# Altium PCB FOOTPRINT FOR BOOTOM PART V1.pcbdoc
Units mil, origin at the board's own origin, x right, y up, seen from the top; angles counter-clockwise.
Board outline 3689 x 3689 mil, 2 copper layers (Top Layer, Bottom Layer), stack 62.2 mil thick; 1 components, 0 nets, 0 pads, 0 vias.
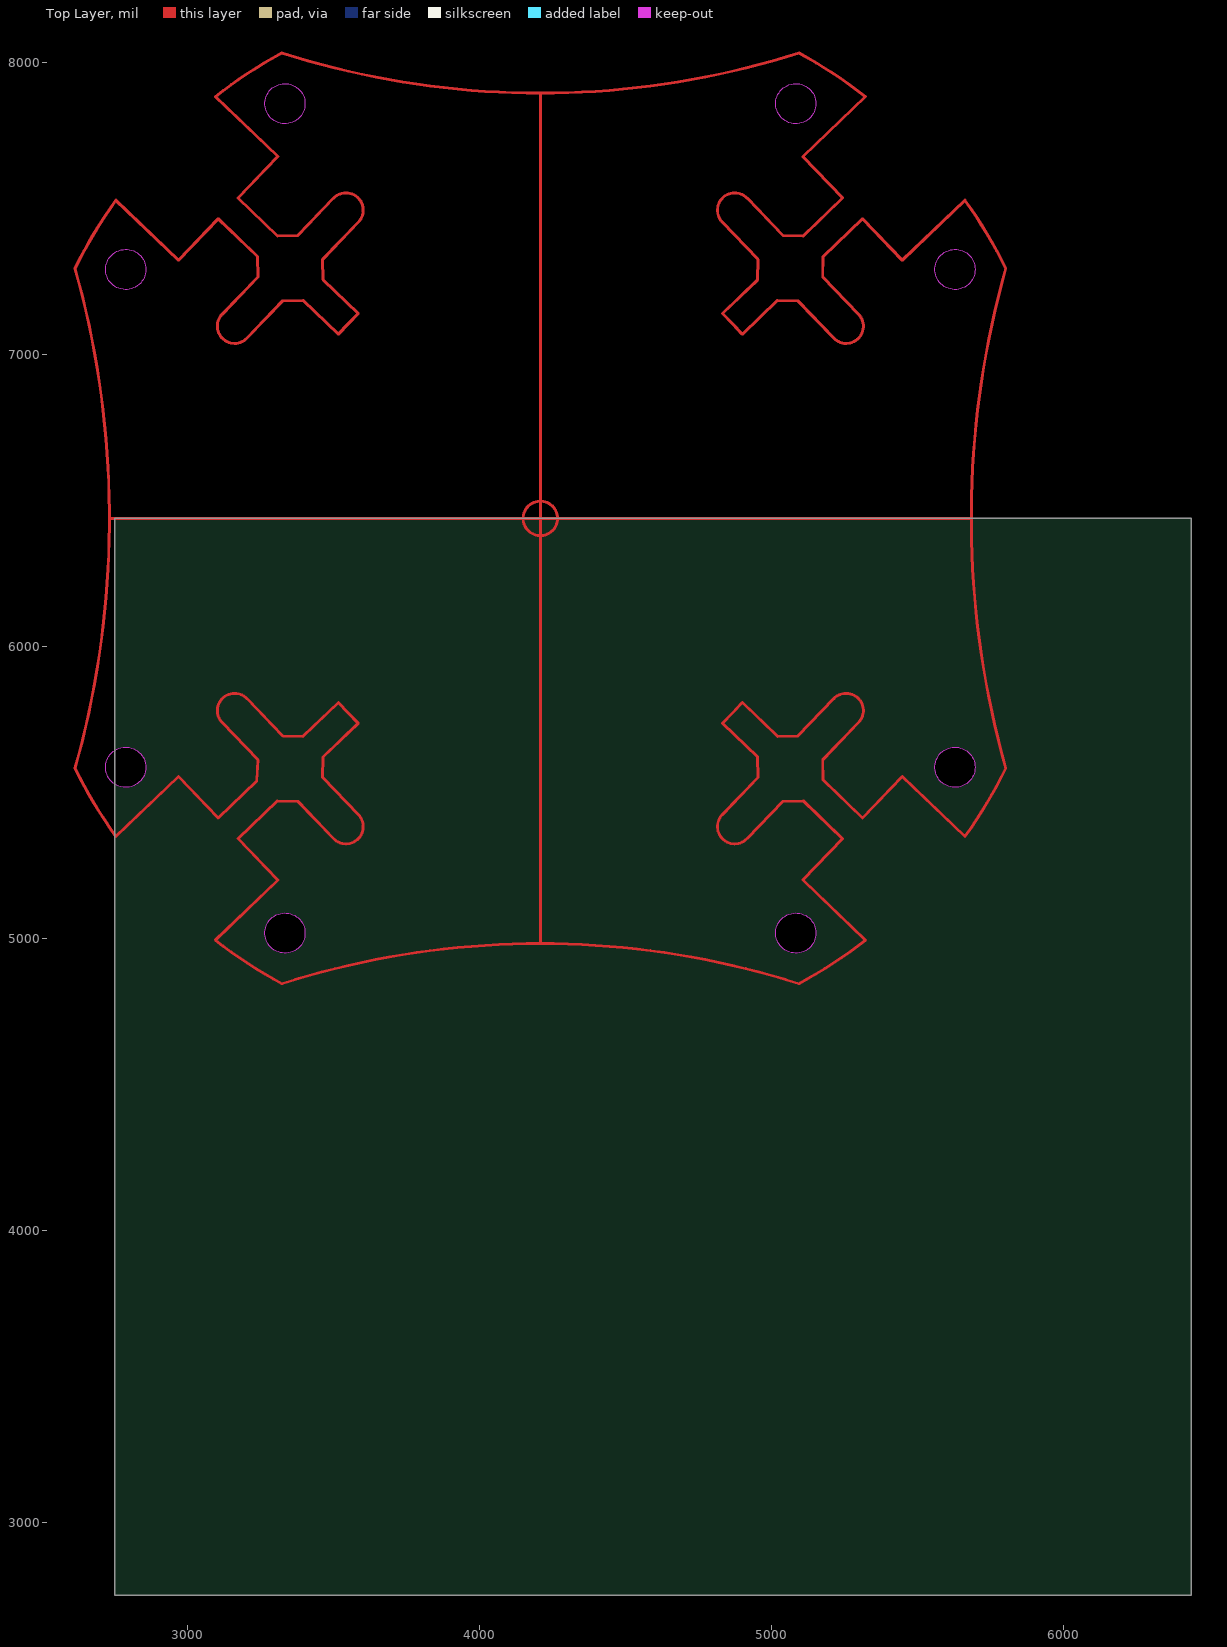
[diagram p0: Top Layer view]
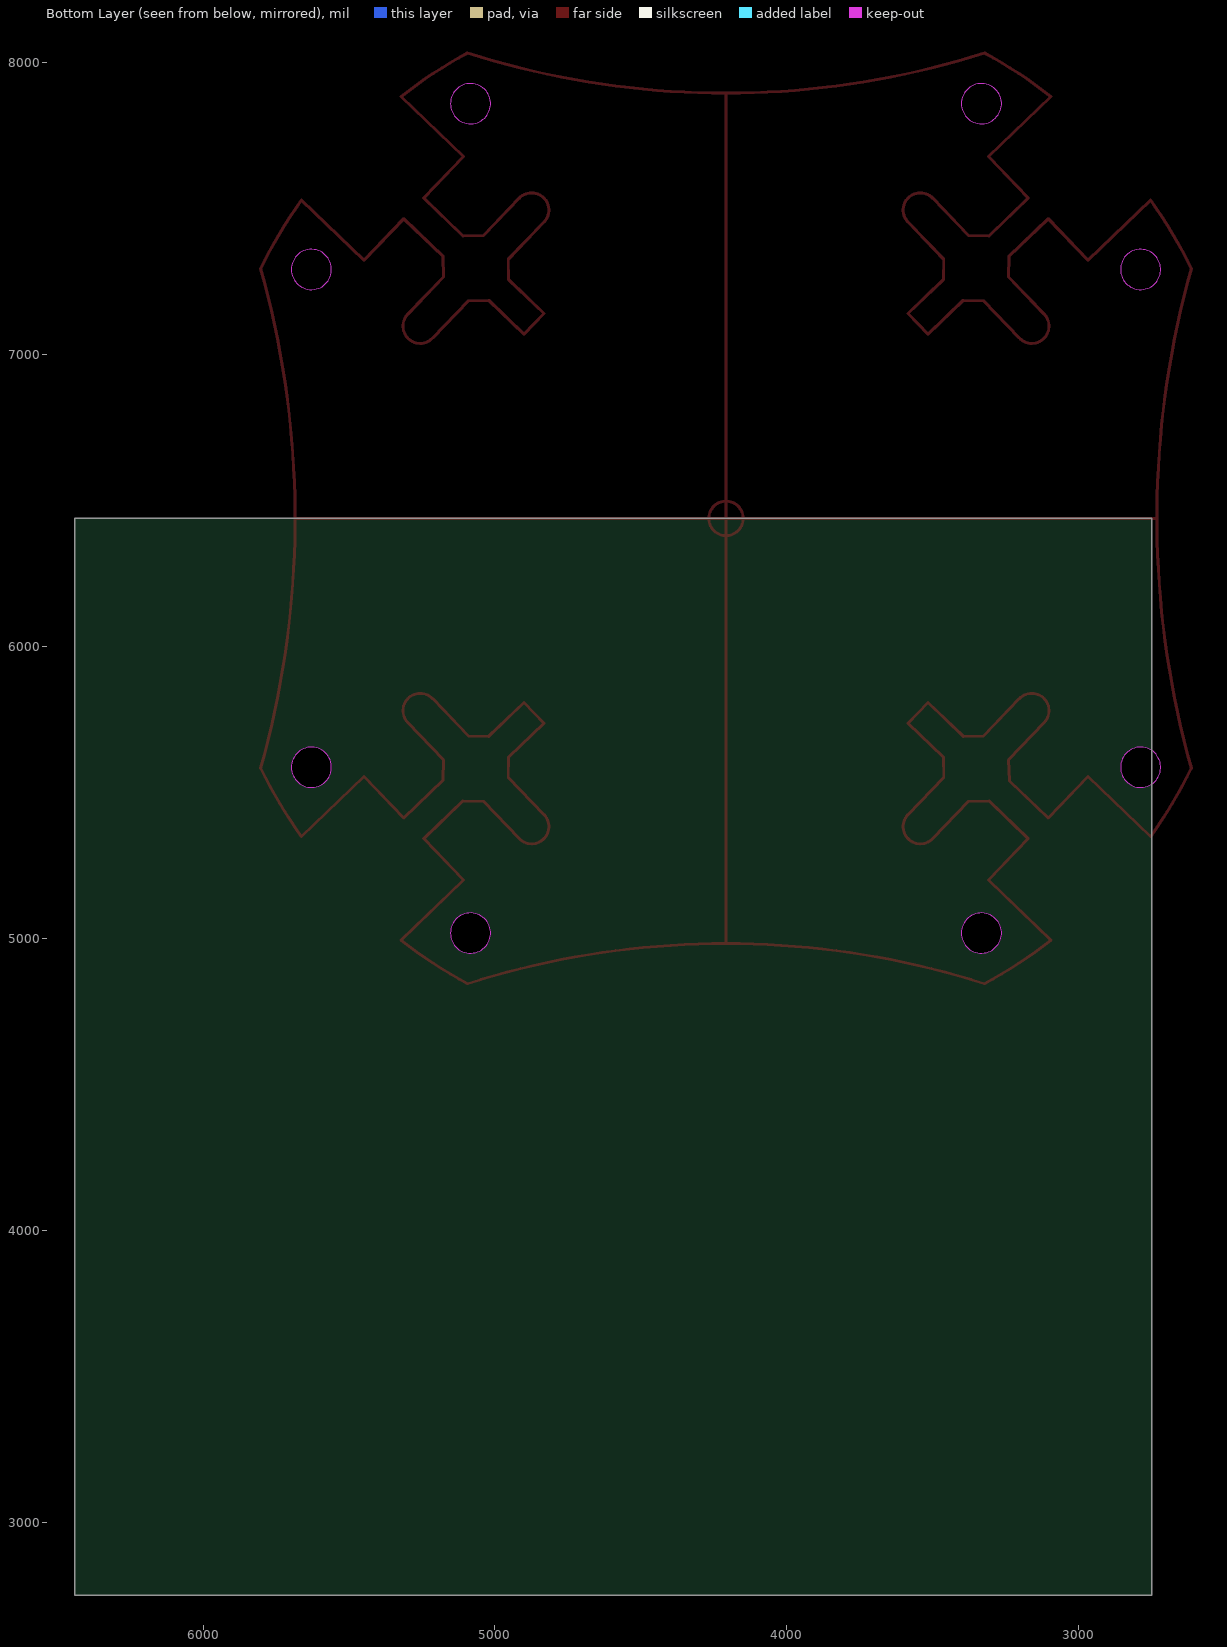
[diagram p1: Bottom Layer view, seen from below]

## Layer stack, top to bottom
Top Solder Mask Layer: solder mask 0.4, Dk 3.3
Top Layer: signal copper 1.4
Dielectric1: surface 59.4, FR4, Dk 4.5
Bottom Layer: signal copper 1.4
Bottom Solder Mask Layer: solder mask 0.4, Dk 3.3

## Board outline
6439,2750 2750,2750 2750,6439 6439,6439

## Components (designator, comment, footprint, x,y, rotation, side; value= is the part's Value field where it differs from the comment)
? "" "FOOTPRINT FOR BOOTOM PART V1" 2507.7,6653.2 r0 top

## Footprints (in the part's own frame and the unit in brackets; to place one, negate y for a bottom-side part, rotate by r counter-clockwise, add the part's x,y. Pads: shape width x height; smd on the part's side, far side on the other; paste and mask are expansions set on the pad)
"FOOTPRINT FOR BOOTOM PART V1" [mil]
  Top Layer drawing of 554 lines, arcs and shapes, not listed
  Board Outline Layer lines w0.1: 211.5,-1070.9 212.3,-1078.2 213.9,-1085.3 216.2,-1092.3 219.2,-1099 222.9,-1105.3 227.3,-1111.2 232.3,-1116.6 237.8,-1121.4 243.8,-1125.6 250.2,-1129.2 257,-1132 264,-1134.2 271.2,-1135.5 278.5,-1136.1 285.8,-1135.9 293.1,-1134.9 300.2,-1133.2 307.1,-1130.7 313.7,-1127.5 319.9,-1123.6 325.7,-1119.1 331,-1114 335.6,-1108.3 339.7,-1102.2 343.1,-1095.7 345.8,-1088.9 347.7,-1081.8 348.8,-1074.5 349.2,-1067.2 348.8,-1059.9 347.7,-1052.7 345.8,-1045.6 343.1,-1038.8 339.7,-1032.2 335.6,-1026.1 331,-1020.5 325.7,-1015.4 319.9,-1010.8 313.7,-1007 307.1,-1003.7 300.2,-1001.3 293.1,-999.5 285.8,-998.5 278.5,-998.3 271.2,-998.9 264,-1000.3 257,-1002.4 250.2,-1005.3 243.8,-1008.8 237.8,-1013 232.3,-1017.9 227.3,-1023.2 222.9,-1029.1 219.2,-1035.5 216.2,-1042.1 213.9,-1049.1 212.3,-1056.3 211.5,-1063.6 211.5,-1070.9 ; 211.5,634.7 212.3,627.4 213.9,620.2 216.2,613.2 219.2,606.6 222.9,600.2 227.3,594.3 232.3,589 237.8,584.1 243.8,579.9 250.2,576.4 257,573.5 264,571.4 271.2,570 278.5,569.4 285.8,569.6 293.1,570.6 300.2,572.4 307.1,574.8 313.7,578.1 319.9,581.9 325.7,586.5 331,591.6 335.6,597.2 339.7,603.3 343.1,609.9 345.8,616.7 347.7,623.8 348.8,631 349.2,638.3 348.8,645.6 347.7,652.9 345.8,660 343.1,666.8 339.7,673.3 335.6,679.4 331,685.1 325.7,690.2 319.9,694.7 313.7,698.6 307.1,701.8 300.2,704.3 293.1,706 285.8,707 278.5,707.2 271.2,706.6 264,705.3 257,703.1 250.2,700.3 243.8,696.7 237.8,692.5 232.3,687.7 227.3,682.3 222.9,676.4 219.2,670.1 216.2,663.4 213.9,656.4 212.3,649.3 211.5,642 211.5,634.7 ; 756.8,-1638.9 757.6,-1646.2 759.2,-1653.4 761.5,-1660.3 764.5,-1667 768.2,-1673.3 772.6,-1679.2 777.6,-1684.6 783.1,-1689.4 789.1,-1693.6 795.5,-1697.2 802.3,-1700.1 809.3,-1702.2 816.5,-1703.5 823.8,-1704.1 831.1,-1703.9 838.4,-1702.9 845.5,-1701.2 852.4,-1698.7 859,-1695.5 865.2,-1691.6 871,-1687.1 876.3,-1682 880.9,-1676.3 885,-1670.2 888.4,-1663.7 891.1,-1656.9 893,-1649.8 894.1,-1642.6 894.5,-1635.2 894.1,-1627.9 893,-1620.7 891.1,-1613.6 888.4,-1606.8 885,-1600.3 880.9,-1594.2 876.3,-1588.5 871,-1583.4 865.2,-1578.9 859,-1575 852.4,-1571.8 845.5,-1569.3 838.4,-1567.5 831.1,-1566.6 823.8,-1566.4 816.5,-1567 809.3,-1568.3 802.3,-1570.4 795.5,-1573.3 789.1,-1576.8 783.1,-1581.1 777.6,-1585.9 772.6,-1591.3 768.2,-1597.2 764.5,-1603.5 761.5,-1610.2 759.2,-1617.1 757.6,-1624.3 756.8,-1631.6 756.8,-1638.9 ; 756.8,1202.7 757.6,1195.4 759.2,1188.2 761.5,1181.3 764.5,1174.6 768.2,1168.3 772.6,1162.4 777.6,1157 783.1,1152.2 789.1,1147.9 795.5,1144.4 802.3,1141.5 809.3,1139.4 816.5,1138.1 823.8,1137.5 831.1,1137.7 838.4,1138.6 845.5,1140.4 852.4,1142.9 859,1146.1 865.2,1150 871,1154.5 876.3,1159.6 880.9,1165.3 885,1171.4 888.4,1177.9 891.1,1184.7 893,1191.8 894.1,1199 894.5,1206.3 894.1,1213.7 893,1220.9 891.1,1228 888.4,1234.8 885,1241.3 880.9,1247.4 876.3,1253.1 871,1258.2 865.2,1262.7 859,1266.6 852.4,1269.8 845.5,1272.3 838.4,1274 831.1,1275 823.8,1275.2 816.5,1274.6 809.3,1273.3 802.3,1271.2 795.5,1268.3 789.1,1264.8 783.1,1260.5 777.6,1255.7 772.6,1250.3 768.2,1244.4 764.5,1238.1 761.5,1231.4 759.2,1224.5 757.6,1217.3 756.8,1210 756.8,1202.7 ; 2507.2,-1638.9 2508,-1646.2 2509.6,-1653.4 2511.9,-1660.3 2514.9,-1667 2518.6,-1673.3 2523,-1679.2 2528,-1684.6 2533.5,-1689.4 2539.5,-1693.6 2545.9,-1697.2 2552.7,-1700.1 2559.7,-1702.2 2566.9,-1703.5 2574.2,-1704.1 2581.5,-1703.9 2588.8,-1702.9 2595.9,-1701.2 2602.8,-1698.7 2609.4,-1695.5 2615.7,-1691.6 2621.4,-1687.1 2626.7,-1682 2631.4,-1676.3 2635.4,-1670.2 2638.8,-1663.7 2641.5,-1656.9 2643.4,-1649.8 2644.6,-1642.6 2644.9,-1635.2 2644.6,-1627.9 2643.4,-1620.7 2641.5,-1613.6 2638.8,-1606.8 2635.4,-1600.3 2631.4,-1594.2 2626.7,-1588.5 2621.4,-1583.4 2615.7,-1578.9 2609.4,-1575 2602.8,-1571.8 2595.9,-1569.3 2588.8,-1567.5 2581.5,-1566.6 2574.2,-1566.4 2566.9,-1567 2559.7,-1568.3 2552.7,-1570.4 2545.9,-1573.3 2539.5,-1576.8 2533.5,-1581.1 2528,-1585.9 2523,-1591.3 2518.6,-1597.2 2514.9,-1603.5 2511.9,-1610.2 2509.6,-1617.1 2508,-1624.3 2507.2,-1631.6 2507.2,-1638.9 ; 2507.2,1202.7 2508,1195.4 2509.6,1188.2 2511.9,1181.3 2514.9,1174.6 2518.6,1168.3 2523,1162.4 2528,1157 2533.5,1152.2 2539.5,1147.9 2545.9,1144.4 2552.7,1141.5 2559.7,1139.4 2566.9,1138.1 2574.2,1137.5 2581.5,1137.7 2588.8,1138.6 2595.9,1140.4 2602.8,1142.9 2609.4,1146.1 2615.7,1150 2621.4,1154.5 2626.7,1159.6 2631.4,1165.3 2635.4,1171.4 2638.8,1177.9 2641.5,1184.7 2643.4,1191.8 2644.6,1199 2644.9,1206.3 2644.6,1213.7 2643.4,1220.9 2641.5,1228 2638.8,1234.8 2635.4,1241.3 2631.4,1247.4 2626.7,1253.1 2621.4,1258.2 2615.7,1262.7 2609.4,1266.6 2602.8,1269.8 2595.9,1272.3 2588.8,1274 2581.5,1275 2574.2,1275.2 2566.9,1274.6 2559.7,1273.3 2552.7,1271.2 2545.9,1268.3 2539.5,1264.8 2533.5,1260.5 2528,1255.7 2523,1250.3 2518.6,1244.4 2514.9,1238.1 2511.9,1231.4 2509.6,1224.5 2508,1217.3 2507.2,1210 2507.2,1202.7 ; 3052.6,-1070.9 3053.3,-1078.2 3054.9,-1085.3 3057.2,-1092.3 3060.2,-1099 3063.9,-1105.3 3068.3,-1111.2 3073.3,-1116.6 3078.8,-1121.4 3084.8,-1125.6 3091.2,-1129.2 3098,-1132 3105,-1134.2 3112.2,-1135.5 3119.5,-1136.1 3126.8,-1135.9 3134.1,-1134.9 3141.2,-1133.2 3148.1,-1130.7 3154.7,-1127.5 3161,-1123.6 3166.7,-1119.1 3172,-1114 3176.7,-1108.3 3180.7,-1102.2 3184.1,-1095.7 3186.8,-1088.9 3188.7,-1081.8 3189.9,-1074.5 3190.2,-1067.2 3189.9,-1059.9 3188.7,-1052.7 3186.8,-1045.6 3184.1,-1038.8 3180.7,-1032.2 3176.7,-1026.1 3172,-1020.5 3166.7,-1015.4 3161,-1010.8 3154.7,-1007 3148.1,-1003.7 3141.2,-1001.3 3134.1,-999.5 3126.8,-998.5 3119.5,-998.3 3112.2,-998.9 3105,-1000.3 3098,-1002.4 3091.2,-1005.3 3084.8,-1008.8 3078.8,-1013 3073.3,-1017.9 3068.3,-1023.2 3063.9,-1029.1 3060.2,-1035.5 3057.2,-1042.1 3054.9,-1049.1 3053.3,-1056.3 3052.6,-1063.6 3052.6,-1070.9 ; 3052.6,634.7 3053.3,627.4 3054.9,620.2 3057.2,613.2 3060.2,606.6 3063.9,600.2 3068.3,594.3 3073.3,589 3078.8,584.1 3084.8,579.9 3091.2,576.4 3098,573.5 3105,571.4 3112.2,570 3119.5,569.4 3126.8,569.6 3134.1,570.6 3141.2,572.4 3148.1,574.8 3154.7,578.1 3161,581.9 3166.7,586.5 3172,591.6 3176.7,597.2 3180.7,603.3 3184.1,609.9 3186.8,616.7 3188.7,623.8 3189.9,631 3190.2,638.3 3189.9,645.6 3188.7,652.9 3186.8,660 3184.1,666.8 3180.7,673.3 3176.7,679.4 3172,685.1 3166.7,690.2 3161,694.7 3154.7,698.6 3148.1,701.8 3141.2,704.3 3134.1,706 3126.8,707 3119.5,707.2 3112.2,706.6 3105,705.3 3098,703.1 3091.2,700.3 3084.8,696.7 3078.8,692.5 3073.3,687.7 3068.3,682.3 3063.9,676.4 3060.2,670.1 3057.2,663.4 3054.9,656.4 3053.3,649.3 3052.6,642 3052.6,634.7
  Board Outline Layer region: 3190.2,638.3 3189.9,631 3188.7,623.8 3186.8,616.7 3184.1,609.9 3180.7,603.3 3176.7,597.2 3172,591.6 3166.7,586.5 3161,581.9 3154.7,578.1 3148.1,574.8 3141.2,572.4 3134.1,570.6 3126.8,569.6 3119.5,569.4 3112.2,570 3105,571.4 3098,573.5 3091.2,576.4 3084.8,579.9 3078.8,584.1 3073.3,589 3068.3,594.3 3063.9,600.2 3060.2,606.6 3057.2,613.2 3054.9,620.2 3053.3,627.4 3052.6,634.7 3052.6,642 3053.3,649.3 3054.9,656.4 3057.2,663.4 3060.2,670.1 3063.9,676.4 3068.3,682.3 3073.3,687.7 3078.8,692.5 3084.8,696.7 3091.2,700.3 3098,703.1 3105,705.3 3112.2,706.6 3119.5,707.2 3126.8,707 3134.1,706 3141.2,704.3 3148.1,701.8 3154.7,698.6 3161,694.7 3166.7,690.2 3172,685.1 3176.7,679.4 3180.7,673.3 3184.1,666.8 3186.8,660 3188.7,652.9 3189.9,645.6
  Board Outline Layer region: 3190.2,638.3 3189.9,631 3188.7,623.8 3186.8,616.7 3184.1,609.9 3180.7,603.3 3176.7,597.2 3172,591.6 3166.7,586.5 3161,581.9 3154.7,578.1 3148.1,574.8 3141.2,572.4 3134.1,570.6 3126.8,569.6 3119.5,569.4 3112.2,570 3105,571.4 3098,573.5 3091.2,576.4 3084.8,579.9 3078.8,584.1 3073.3,589 3068.3,594.3 3063.9,600.2 3060.2,606.6 3057.2,613.2 3054.9,620.2 3053.3,627.4 3052.6,634.7 3052.6,642 3053.3,649.3 3054.9,656.4 3057.2,663.4 3060.2,670.1 3063.9,676.4 3068.3,682.3 3073.3,687.7 3078.8,692.5 3084.8,696.7 3091.2,700.3 3098,703.1 3105,705.3 3112.2,706.6 3119.5,707.2 3126.8,707 3134.1,706 3141.2,704.3 3148.1,701.8 3154.7,698.6 3161,694.7 3166.7,690.2 3172,685.1 3176.7,679.4 3180.7,673.3 3184.1,666.8 3186.8,660 3188.7,652.9 3189.9,645.6
  Board Outline Layer region: 2644.9,1206.3 2644.6,1199 2643.4,1191.8 2641.5,1184.7 2638.8,1177.9 2635.4,1171.4 2631.4,1165.3 2626.7,1159.6 2621.4,1154.5 2615.7,1150 2609.4,1146.1 2602.8,1142.9 2595.9,1140.4 2588.8,1138.6 2581.5,1137.7 2574.2,1137.5 2566.9,1138.1 2559.7,1139.4 2552.7,1141.5 2545.9,1144.4 2539.5,1147.9 2533.5,1152.2 2528,1157 2523,1162.4 2518.6,1168.3 2514.9,1174.6 2511.9,1181.3 2509.6,1188.2 2508,1195.4 2507.2,1202.7 2507.2,1210 2508,1217.3 2509.6,1224.5 2511.9,1231.4 2514.9,1238.1 2518.6,1244.4 2523,1250.3 2528,1255.7 2533.5,1260.5 2539.5,1264.8 2545.9,1268.3 2552.7,1271.2 2559.7,1273.3 2566.9,1274.6 2574.2,1275.2 2581.5,1275 2588.8,1274 2595.9,1272.3 2602.8,1269.8 2609.4,1266.6 2615.7,1262.7 2621.4,1258.2 2626.7,1253.1 2631.4,1247.4 2635.4,1241.3 2638.8,1234.8 2641.5,1228 2643.4,1220.9 2644.6,1213.7
  Board Outline Layer region: 2644.9,1206.3 2644.6,1199 2643.4,1191.8 2641.5,1184.7 2638.8,1177.9 2635.4,1171.4 2631.4,1165.3 2626.7,1159.6 2621.4,1154.5 2615.7,1150 2609.4,1146.1 2602.8,1142.9 2595.9,1140.4 2588.8,1138.6 2581.5,1137.7 2574.2,1137.5 2566.9,1138.1 2559.7,1139.4 2552.7,1141.5 2545.9,1144.4 2539.5,1147.9 2533.5,1152.2 2528,1157 2523,1162.4 2518.6,1168.3 2514.9,1174.6 2511.9,1181.3 2509.6,1188.2 2508,1195.4 2507.2,1202.7 2507.2,1210 2508,1217.3 2509.6,1224.5 2511.9,1231.4 2514.9,1238.1 2518.6,1244.4 2523,1250.3 2528,1255.7 2533.5,1260.5 2539.5,1264.8 2545.9,1268.3 2552.7,1271.2 2559.7,1273.3 2566.9,1274.6 2574.2,1275.2 2581.5,1275 2588.8,1274 2595.9,1272.3 2602.8,1269.8 2609.4,1266.6 2615.7,1262.7 2621.4,1258.2 2626.7,1253.1 2631.4,1247.4 2635.4,1241.3 2638.8,1234.8 2641.5,1228 2643.4,1220.9 2644.6,1213.7
  Board Outline Layer region: 894.5,1206.3 894.1,1199 893,1191.8 891.1,1184.7 888.4,1177.9 885,1171.4 880.9,1165.3 876.3,1159.6 871,1154.5 865.2,1150 859,1146.1 852.4,1142.9 845.5,1140.4 838.4,1138.6 831.1,1137.7 823.8,1137.5 816.5,1138.1 809.3,1139.4 802.3,1141.5 795.5,1144.4 789.1,1147.9 783.1,1152.2 777.6,1157 772.6,1162.4 768.2,1168.3 764.5,1174.6 761.5,1181.3 759.2,1188.2 757.6,1195.4 756.8,1202.7 756.8,1210 757.6,1217.3 759.2,1224.5 761.5,1231.4 764.5,1238.1 768.2,1244.4 772.6,1250.3 777.6,1255.7 783.1,1260.5 789.1,1264.8 795.5,1268.3 802.3,1271.2 809.3,1273.3 816.5,1274.6 823.8,1275.2 831.1,1275 838.4,1274 845.5,1272.3 852.4,1269.8 859,1266.6 865.2,1262.7 871,1258.2 876.3,1253.1 880.9,1247.4 885,1241.3 888.4,1234.8 891.1,1228 893,1220.9 894.1,1213.7
  Board Outline Layer region: 894.5,1206.3 894.1,1199 893,1191.8 891.1,1184.7 888.4,1177.9 885,1171.4 880.9,1165.3 876.3,1159.6 871,1154.5 865.2,1150 859,1146.1 852.4,1142.9 845.5,1140.4 838.4,1138.6 831.1,1137.7 823.8,1137.5 816.5,1138.1 809.3,1139.4 802.3,1141.5 795.5,1144.4 789.1,1147.9 783.1,1152.2 777.6,1157 772.6,1162.4 768.2,1168.3 764.5,1174.6 761.5,1181.3 759.2,1188.2 757.6,1195.4 756.8,1202.7 756.8,1210 757.6,1217.3 759.2,1224.5 761.5,1231.4 764.5,1238.1 768.2,1244.4 772.6,1250.3 777.6,1255.7 783.1,1260.5 789.1,1264.8 795.5,1268.3 802.3,1271.2 809.3,1273.3 816.5,1274.6 823.8,1275.2 831.1,1275 838.4,1274 845.5,1272.3 852.4,1269.8 859,1266.6 865.2,1262.7 871,1258.2 876.3,1253.1 880.9,1247.4 885,1241.3 888.4,1234.8 891.1,1228 893,1220.9 894.1,1213.7
  Board Outline Layer region: 349.2,638.3 348.8,631 347.7,623.8 345.8,616.7 343.1,609.9 339.7,603.3 335.6,597.2 331,591.6 325.7,586.5 319.9,581.9 313.7,578.1 307.1,574.8 300.2,572.4 293.1,570.6 285.8,569.6 278.5,569.4 271.2,570 264,571.4 257,573.5 250.2,576.4 243.8,579.9 237.8,584.1 232.3,589 227.3,594.3 222.9,600.2 219.2,606.6 216.2,613.2 213.9,620.2 212.3,627.4 211.5,634.7 211.5,642 212.3,649.3 213.9,656.4 216.2,663.4 219.2,670.1 222.9,676.4 227.3,682.3 232.3,687.7 237.8,692.5 243.8,696.7 250.2,700.3 257,703.1 264,705.3 271.2,706.6 278.5,707.2 285.8,707 293.1,706 300.2,704.3 307.1,701.8 313.7,698.6 319.9,694.7 325.7,690.2 331,685.1 335.6,679.4 339.7,673.3 343.1,666.8 345.8,660 347.7,652.9 348.8,645.6
  Board Outline Layer region: 349.2,638.3 348.8,631 347.7,623.8 345.8,616.7 343.1,609.9 339.7,603.3 335.6,597.2 331,591.6 325.7,586.5 319.9,581.9 313.7,578.1 307.1,574.8 300.2,572.4 293.1,570.6 285.8,569.6 278.5,569.4 271.2,570 264,571.4 257,573.5 250.2,576.4 243.8,579.9 237.8,584.1 232.3,589 227.3,594.3 222.9,600.2 219.2,606.6 216.2,613.2 213.9,620.2 212.3,627.4 211.5,634.7 211.5,642 212.3,649.3 213.9,656.4 216.2,663.4 219.2,670.1 222.9,676.4 227.3,682.3 232.3,687.7 237.8,692.5 243.8,696.7 250.2,700.3 257,703.1 264,705.3 271.2,706.6 278.5,707.2 285.8,707 293.1,706 300.2,704.3 307.1,701.8 313.7,698.6 319.9,694.7 325.7,690.2 331,685.1 335.6,679.4 339.7,673.3 343.1,666.8 345.8,660 347.7,652.9 348.8,645.6
  Board Outline Layer region: 3190.2,-1067.2 3189.9,-1074.5 3188.7,-1081.8 3186.8,-1088.9 3184.1,-1095.7 3180.7,-1102.2 3176.7,-1108.3 3172,-1114 3166.7,-1119.1 3161,-1123.6 3154.7,-1127.5 3148.1,-1130.7 3141.2,-1133.2 3134.1,-1134.9 3126.8,-1135.9 3119.5,-1136.1 3112.2,-1135.5 3105,-1134.2 3098,-1132 3091.2,-1129.2 3084.8,-1125.6 3078.8,-1121.4 3073.3,-1116.6 3068.3,-1111.2 3063.9,-1105.3 3060.2,-1099 3057.2,-1092.3 3054.9,-1085.3 3053.3,-1078.2 3052.6,-1070.9 3052.6,-1063.6 3053.3,-1056.3 3054.9,-1049.1 3057.2,-1042.1 3060.2,-1035.5 3063.9,-1029.1 3068.3,-1023.2 3073.3,-1017.9 3078.8,-1013 3084.8,-1008.8 3091.2,-1005.3 3098,-1002.4 3105,-1000.3 3112.2,-998.9 3119.5,-998.3 3126.8,-998.5 3134.1,-999.5 3141.2,-1001.3 3148.1,-1003.7 3154.7,-1007 3161,-1010.8 3166.7,-1015.4 3172,-1020.5 3176.7,-1026.1 3180.7,-1032.2 3184.1,-1038.8 3186.8,-1045.6 3188.7,-1052.7 3189.9,-1059.9
  Board Outline Layer region: 3190.2,-1067.2 3189.9,-1074.5 3188.7,-1081.8 3186.8,-1088.9 3184.1,-1095.7 3180.7,-1102.2 3176.7,-1108.3 3172,-1114 3166.7,-1119.1 3161,-1123.6 3154.7,-1127.5 3148.1,-1130.7 3141.2,-1133.2 3134.1,-1134.9 3126.8,-1135.9 3119.5,-1136.1 3112.2,-1135.5 3105,-1134.2 3098,-1132 3091.2,-1129.2 3084.8,-1125.6 3078.8,-1121.4 3073.3,-1116.6 3068.3,-1111.2 3063.9,-1105.3 3060.2,-1099 3057.2,-1092.3 3054.9,-1085.3 3053.3,-1078.2 3052.6,-1070.9 3052.6,-1063.6 3053.3,-1056.3 3054.9,-1049.1 3057.2,-1042.1 3060.2,-1035.5 3063.9,-1029.1 3068.3,-1023.2 3073.3,-1017.9 3078.8,-1013 3084.8,-1008.8 3091.2,-1005.3 3098,-1002.4 3105,-1000.3 3112.2,-998.9 3119.5,-998.3 3126.8,-998.5 3134.1,-999.5 3141.2,-1001.3 3148.1,-1003.7 3154.7,-1007 3161,-1010.8 3166.7,-1015.4 3172,-1020.5 3176.7,-1026.1 3180.7,-1032.2 3184.1,-1038.8 3186.8,-1045.6 3188.7,-1052.7 3189.9,-1059.9
  Board Outline Layer region: 2644.9,-1635.2 2644.6,-1642.6 2643.4,-1649.8 2641.5,-1656.9 2638.8,-1663.7 2635.4,-1670.2 2631.4,-1676.3 2626.7,-1682 2621.4,-1687.1 2615.7,-1691.6 2609.4,-1695.5 2602.8,-1698.7 2595.9,-1701.2 2588.8,-1702.9 2581.5,-1703.9 2574.2,-1704.1 2566.9,-1703.5 2559.7,-1702.2 2552.7,-1700.1 2545.9,-1697.2 2539.5,-1693.6 2533.5,-1689.4 2528,-1684.6 2523,-1679.2 2518.6,-1673.3 2514.9,-1667 2511.9,-1660.3 2509.6,-1653.4 2508,-1646.2 2507.2,-1638.9 2507.2,-1631.6 2508,-1624.3 2509.6,-1617.1 2511.9,-1610.2 2514.9,-1603.5 2518.6,-1597.2 2523,-1591.3 2528,-1585.9 2533.5,-1581.1 2539.5,-1576.8 2545.9,-1573.3 2552.7,-1570.4 2559.7,-1568.3 2566.9,-1567 2574.2,-1566.4 2581.5,-1566.6 2588.8,-1567.5 2595.9,-1569.3 2602.8,-1571.8 2609.4,-1575 2615.7,-1578.9 2621.4,-1583.4 2626.7,-1588.5 2631.4,-1594.2 2635.4,-1600.3 2638.8,-1606.8 2641.5,-1613.6 2643.4,-1620.7 2644.6,-1627.9
  Board Outline Layer region: 2644.9,-1635.2 2644.6,-1642.6 2643.4,-1649.8 2641.5,-1656.9 2638.8,-1663.7 2635.4,-1670.2 2631.4,-1676.3 2626.7,-1682 2621.4,-1687.1 2615.7,-1691.6 2609.4,-1695.5 2602.8,-1698.7 2595.9,-1701.2 2588.8,-1702.9 2581.5,-1703.9 2574.2,-1704.1 2566.9,-1703.5 2559.7,-1702.2 2552.7,-1700.1 2545.9,-1697.2 2539.5,-1693.6 2533.5,-1689.4 2528,-1684.6 2523,-1679.2 2518.6,-1673.3 2514.9,-1667 2511.9,-1660.3 2509.6,-1653.4 2508,-1646.2 2507.2,-1638.9 2507.2,-1631.6 2508,-1624.3 2509.6,-1617.1 2511.9,-1610.2 2514.9,-1603.5 2518.6,-1597.2 2523,-1591.3 2528,-1585.9 2533.5,-1581.1 2539.5,-1576.8 2545.9,-1573.3 2552.7,-1570.4 2559.7,-1568.3 2566.9,-1567 2574.2,-1566.4 2581.5,-1566.6 2588.8,-1567.5 2595.9,-1569.3 2602.8,-1571.8 2609.4,-1575 2615.7,-1578.9 2621.4,-1583.4 2626.7,-1588.5 2631.4,-1594.2 2635.4,-1600.3 2638.8,-1606.8 2641.5,-1613.6 2643.4,-1620.7 2644.6,-1627.9
  Board Outline Layer region: 894.5,-1635.2 894.1,-1642.6 893,-1649.8 891.1,-1656.9 888.4,-1663.7 885,-1670.2 880.9,-1676.3 876.3,-1682 871,-1687.1 865.2,-1691.6 859,-1695.5 852.4,-1698.7 845.5,-1701.2 838.4,-1702.9 831.1,-1703.9 823.8,-1704.1 816.5,-1703.5 809.3,-1702.2 802.3,-1700.1 795.5,-1697.2 789.1,-1693.6 783.1,-1689.4 777.6,-1684.6 772.6,-1679.2 768.2,-1673.3 764.5,-1667 761.5,-1660.3 759.2,-1653.4 757.6,-1646.2 756.8,-1638.9 756.8,-1631.6 757.6,-1624.3 759.2,-1617.1 761.5,-1610.2 764.5,-1603.5 768.2,-1597.2 772.6,-1591.3 777.6,-1585.9 783.1,-1581.1 789.1,-1576.8 795.5,-1573.3 802.3,-1570.4 809.3,-1568.3 816.5,-1567 823.8,-1566.4 831.1,-1566.6 838.4,-1567.5 845.5,-1569.3 852.4,-1571.8 859,-1575 865.2,-1578.9 871,-1583.4 876.3,-1588.5 880.9,-1594.2 885,-1600.3 888.4,-1606.8 891.1,-1613.6 893,-1620.7 894.1,-1627.9
  Board Outline Layer region: 894.5,-1635.2 894.1,-1642.6 893,-1649.8 891.1,-1656.9 888.4,-1663.7 885,-1670.2 880.9,-1676.3 876.3,-1682 871,-1687.1 865.2,-1691.6 859,-1695.5 852.4,-1698.7 845.5,-1701.2 838.4,-1702.9 831.1,-1703.9 823.8,-1704.1 816.5,-1703.5 809.3,-1702.2 802.3,-1700.1 795.5,-1697.2 789.1,-1693.6 783.1,-1689.4 777.6,-1684.6 772.6,-1679.2 768.2,-1673.3 764.5,-1667 761.5,-1660.3 759.2,-1653.4 757.6,-1646.2 756.8,-1638.9 756.8,-1631.6 757.6,-1624.3 759.2,-1617.1 761.5,-1610.2 764.5,-1603.5 768.2,-1597.2 772.6,-1591.3 777.6,-1585.9 783.1,-1581.1 789.1,-1576.8 795.5,-1573.3 802.3,-1570.4 809.3,-1568.3 816.5,-1567 823.8,-1566.4 831.1,-1566.6 838.4,-1567.5 845.5,-1569.3 852.4,-1571.8 859,-1575 865.2,-1578.9 871,-1583.4 876.3,-1588.5 880.9,-1594.2 885,-1600.3 888.4,-1606.8 891.1,-1613.6 893,-1620.7 894.1,-1627.9
  Board Outline Layer region: 349.2,-1067.2 348.8,-1074.5 347.7,-1081.8 345.8,-1088.9 343.1,-1095.7 339.7,-1102.2 335.6,-1108.3 331,-1114 325.7,-1119.1 319.9,-1123.6 313.7,-1127.5 307.1,-1130.7 300.2,-1133.2 293.1,-1134.9 285.8,-1135.9 278.5,-1136.1 271.2,-1135.5 264,-1134.2 257,-1132 250.2,-1129.2 243.8,-1125.6 237.8,-1121.4 232.3,-1116.6 227.3,-1111.2 222.9,-1105.3 219.2,-1099 216.2,-1092.3 213.9,-1085.3 212.3,-1078.2 211.5,-1070.9 211.5,-1063.6 212.3,-1056.3 213.9,-1049.1 216.2,-1042.1 219.2,-1035.5 222.9,-1029.1 227.3,-1023.2 232.3,-1017.9 237.8,-1013 243.8,-1008.8 250.2,-1005.3 257,-1002.4 264,-1000.3 271.2,-998.9 278.5,-998.3 285.8,-998.5 293.1,-999.5 300.2,-1001.3 307.1,-1003.7 313.7,-1007 319.9,-1010.8 325.7,-1015.4 331,-1020.5 335.6,-1026.1 339.7,-1032.2 343.1,-1038.8 345.8,-1045.6 347.7,-1052.7 348.8,-1059.9
  Board Outline Layer region: 349.2,-1067.2 348.8,-1074.5 347.7,-1081.8 345.8,-1088.9 343.1,-1095.7 339.7,-1102.2 335.6,-1108.3 331,-1114 325.7,-1119.1 319.9,-1123.6 313.7,-1127.5 307.1,-1130.7 300.2,-1133.2 293.1,-1134.9 285.8,-1135.9 278.5,-1136.1 271.2,-1135.5 264,-1134.2 257,-1132 250.2,-1129.2 243.8,-1125.6 237.8,-1121.4 232.3,-1116.6 227.3,-1111.2 222.9,-1105.3 219.2,-1099 216.2,-1092.3 213.9,-1085.3 212.3,-1078.2 211.5,-1070.9 211.5,-1063.6 212.3,-1056.3 213.9,-1049.1 216.2,-1042.1 219.2,-1035.5 222.9,-1029.1 227.3,-1023.2 232.3,-1017.9 237.8,-1013 243.8,-1008.8 250.2,-1005.3 257,-1002.4 264,-1000.3 271.2,-998.9 278.5,-998.3 285.8,-998.5 293.1,-999.5 300.2,-1001.3 307.1,-1003.7 313.7,-1007 319.9,-1010.8 325.7,-1015.4 331,-1020.5 335.6,-1026.1 339.7,-1032.2 343.1,-1038.8 345.8,-1045.6 347.7,-1052.7 348.8,-1059.9
  Multi-Layer board cut-out: 3190.2,638.3 3189.9,631 3188.7,623.8 3186.8,616.7 3184.1,609.9 3180.7,603.3 3176.7,597.2 3172,591.6 3166.7,586.5 3161,581.9 3154.7,578.1 3148.1,574.8 3141.2,572.4 3134.1,570.6 3126.8,569.6 3119.5,569.4 3112.2,570 3105,571.4 3098,573.5 3091.2,576.4 3084.8,579.9 3078.8,584.1 3073.3,589 3068.3,594.3 3063.9,600.2 3060.2,606.6 3057.2,613.2 3054.9,620.2 3053.3,627.4 3052.6,634.7 3052.6,642 3053.3,649.3 3054.9,656.4 3057.2,663.4 3060.2,670.1 3063.9,676.4 3068.3,682.3 3073.3,687.7 3078.8,692.5 3084.8,696.7 3091.2,700.3 3098,703.1 3105,705.3 3112.2,706.6 3119.5,707.2 3126.8,707 3134.1,706 3141.2,704.3 3148.1,701.8 3154.7,698.6 3161,694.7 3166.7,690.2 3172,685.1 3176.7,679.4 3180.7,673.3 3184.1,666.8 3186.8,660 3188.7,652.9 3189.9,645.6
  Multi-Layer board cut-out: 2644.9,1206.3 2644.6,1199 2643.4,1191.8 2641.5,1184.7 2638.8,1177.9 2635.4,1171.4 2631.4,1165.3 2626.7,1159.6 2621.4,1154.5 2615.7,1150 2609.4,1146.1 2602.8,1142.9 2595.9,1140.4 2588.8,1138.6 2581.5,1137.7 2574.2,1137.5 2566.9,1138.1 2559.7,1139.4 2552.7,1141.5 2545.9,1144.4 2539.5,1147.9 2533.5,1152.2 2528,1157 2523,1162.4 2518.6,1168.3 2514.9,1174.6 2511.9,1181.3 2509.6,1188.2 2508,1195.4 2507.2,1202.7 2507.2,1210 2508,1217.3 2509.6,1224.5 2511.9,1231.4 2514.9,1238.1 2518.6,1244.4 2523,1250.3 2528,1255.7 2533.5,1260.5 2539.5,1264.8 2545.9,1268.3 2552.7,1271.2 2559.7,1273.3 2566.9,1274.6 2574.2,1275.2 2581.5,1275 2588.8,1274 2595.9,1272.3 2602.8,1269.8 2609.4,1266.6 2615.7,1262.7 2621.4,1258.2 2626.7,1253.1 2631.4,1247.4 2635.4,1241.3 2638.8,1234.8 2641.5,1228 2643.4,1220.9 2644.6,1213.7
  Multi-Layer board cut-out: 894.5,1206.3 894.1,1199 893,1191.8 891.1,1184.7 888.4,1177.9 885,1171.4 880.9,1165.3 876.3,1159.6 871,1154.5 865.2,1150 859,1146.1 852.4,1142.9 845.5,1140.4 838.4,1138.6 831.1,1137.7 823.8,1137.5 816.5,1138.1 809.3,1139.4 802.3,1141.5 795.5,1144.4 789.1,1147.9 783.1,1152.2 777.6,1157 772.6,1162.4 768.2,1168.3 764.5,1174.6 761.5,1181.3 759.2,1188.2 757.6,1195.4 756.8,1202.7 756.8,1210 757.6,1217.3 759.2,1224.5 761.5,1231.4 764.5,1238.1 768.2,1244.4 772.6,1250.3 777.6,1255.7 783.1,1260.5 789.1,1264.8 795.5,1268.3 802.3,1271.2 809.3,1273.3 816.5,1274.6 823.8,1275.2 831.1,1275 838.4,1274 845.5,1272.3 852.4,1269.8 859,1266.6 865.2,1262.7 871,1258.2 876.3,1253.1 880.9,1247.4 885,1241.3 888.4,1234.8 891.1,1228 893,1220.9 894.1,1213.7
  Multi-Layer board cut-out: 349.2,638.3 348.8,631 347.7,623.8 345.8,616.7 343.1,609.9 339.7,603.3 335.6,597.2 331,591.6 325.7,586.5 319.9,581.9 313.7,578.1 307.1,574.8 300.2,572.4 293.1,570.6 285.8,569.6 278.5,569.4 271.2,570 264,571.4 257,573.5 250.2,576.4 243.8,579.9 237.8,584.1 232.3,589 227.3,594.3 222.9,600.2 219.2,606.6 216.2,613.2 213.9,620.2 212.3,627.4 211.5,634.7 211.5,642 212.3,649.3 213.9,656.4 216.2,663.4 219.2,670.1 222.9,676.4 227.3,682.3 232.3,687.7 237.8,692.5 243.8,696.7 250.2,700.3 257,703.1 264,705.3 271.2,706.6 278.5,707.2 285.8,707 293.1,706 300.2,704.3 307.1,701.8 313.7,698.6 319.9,694.7 325.7,690.2 331,685.1 335.6,679.4 339.7,673.3 343.1,666.8 345.8,660 347.7,652.9 348.8,645.6
  Multi-Layer board cut-out: 3190.2,-1067.2 3189.9,-1074.5 3188.7,-1081.8 3186.8,-1088.9 3184.1,-1095.7 3180.7,-1102.2 3176.7,-1108.3 3172,-1114 3166.7,-1119.1 3161,-1123.6 3154.7,-1127.5 3148.1,-1130.7 3141.2,-1133.2 3134.1,-1134.9 3126.8,-1135.9 3119.5,-1136.1 3112.2,-1135.5 3105,-1134.2 3098,-1132 3091.2,-1129.2 3084.8,-1125.6 3078.8,-1121.4 3073.3,-1116.6 3068.3,-1111.2 3063.9,-1105.3 3060.2,-1099 3057.2,-1092.3 3054.9,-1085.3 3053.3,-1078.2 3052.6,-1070.9 3052.6,-1063.6 3053.3,-1056.3 3054.9,-1049.1 3057.2,-1042.1 3060.2,-1035.5 3063.9,-1029.1 3068.3,-1023.2 3073.3,-1017.9 3078.8,-1013 3084.8,-1008.8 3091.2,-1005.3 3098,-1002.4 3105,-1000.3 3112.2,-998.9 3119.5,-998.3 3126.8,-998.5 3134.1,-999.5 3141.2,-1001.3 3148.1,-1003.7 3154.7,-1007 3161,-1010.8 3166.7,-1015.4 3172,-1020.5 3176.7,-1026.1 3180.7,-1032.2 3184.1,-1038.8 3186.8,-1045.6 3188.7,-1052.7 3189.9,-1059.9
  Multi-Layer board cut-out: 2644.9,-1635.2 2644.6,-1642.6 2643.4,-1649.8 2641.5,-1656.9 2638.8,-1663.7 2635.4,-1670.2 2631.4,-1676.3 2626.7,-1682 2621.4,-1687.1 2615.7,-1691.6 2609.4,-1695.5 2602.8,-1698.7 2595.9,-1701.2 2588.8,-1702.9 2581.5,-1703.9 2574.2,-1704.1 2566.9,-1703.5 2559.7,-1702.2 2552.7,-1700.1 2545.9,-1697.2 2539.5,-1693.6 2533.5,-1689.4 2528,-1684.6 2523,-1679.2 2518.6,-1673.3 2514.9,-1667 2511.9,-1660.3 2509.6,-1653.4 2508,-1646.2 2507.2,-1638.9 2507.2,-1631.6 2508,-1624.3 2509.6,-1617.1 2511.9,-1610.2 2514.9,-1603.5 2518.6,-1597.2 2523,-1591.3 2528,-1585.9 2533.5,-1581.1 2539.5,-1576.8 2545.9,-1573.3 2552.7,-1570.4 2559.7,-1568.3 2566.9,-1567 2574.2,-1566.4 2581.5,-1566.6 2588.8,-1567.5 2595.9,-1569.3 2602.8,-1571.8 2609.4,-1575 2615.7,-1578.9 2621.4,-1583.4 2626.7,-1588.5 2631.4,-1594.2 2635.4,-1600.3 2638.8,-1606.8 2641.5,-1613.6 2643.4,-1620.7 2644.6,-1627.9
  Multi-Layer board cut-out: 894.5,-1635.2 894.1,-1642.6 893,-1649.8 891.1,-1656.9 888.4,-1663.7 885,-1670.2 880.9,-1676.3 876.3,-1682 871,-1687.1 865.2,-1691.6 859,-1695.5 852.4,-1698.7 845.5,-1701.2 838.4,-1702.9 831.1,-1703.9 823.8,-1704.1 816.5,-1703.5 809.3,-1702.2 802.3,-1700.1 795.5,-1697.2 789.1,-1693.6 783.1,-1689.4 777.6,-1684.6 772.6,-1679.2 768.2,-1673.3 764.5,-1667 761.5,-1660.3 759.2,-1653.4 757.6,-1646.2 756.8,-1638.9 756.8,-1631.6 757.6,-1624.3 759.2,-1617.1 761.5,-1610.2 764.5,-1603.5 768.2,-1597.2 772.6,-1591.3 777.6,-1585.9 783.1,-1581.1 789.1,-1576.8 795.5,-1573.3 802.3,-1570.4 809.3,-1568.3 816.5,-1567 823.8,-1566.4 831.1,-1566.6 838.4,-1567.5 845.5,-1569.3 852.4,-1571.8 859,-1575 865.2,-1578.9 871,-1583.4 876.3,-1588.5 880.9,-1594.2 885,-1600.3 888.4,-1606.8 891.1,-1613.6 893,-1620.7 894.1,-1627.9
  Multi-Layer board cut-out: 349.2,-1067.2 348.8,-1074.5 347.7,-1081.8 345.8,-1088.9 343.1,-1095.7 339.7,-1102.2 335.6,-1108.3 331,-1114 325.7,-1119.1 319.9,-1123.6 313.7,-1127.5 307.1,-1130.7 300.2,-1133.2 293.1,-1134.9 285.8,-1135.9 278.5,-1136.1 271.2,-1135.5 264,-1134.2 257,-1132 250.2,-1129.2 243.8,-1125.6 237.8,-1121.4 232.3,-1116.6 227.3,-1111.2 222.9,-1105.3 219.2,-1099 216.2,-1092.3 213.9,-1085.3 212.3,-1078.2 211.5,-1070.9 211.5,-1063.6 212.3,-1056.3 213.9,-1049.1 216.2,-1042.1 219.2,-1035.5 222.9,-1029.1 227.3,-1023.2 232.3,-1017.9 237.8,-1013 243.8,-1008.8 250.2,-1005.3 257,-1002.4 264,-1000.3 271.2,-998.9 278.5,-998.3 285.8,-998.5 293.1,-999.5 300.2,-1001.3 307.1,-1003.7 313.7,-1007 319.9,-1010.8 325.7,-1015.4 331,-1020.5 335.6,-1026.1 339.7,-1032.2 343.1,-1038.8 345.8,-1045.6 347.7,-1052.7 348.8,-1059.9

## Nets (pads, with @x,y where several pads share a name; then routed paths per layer and width w, separated by ;. In a path a pad name is that pad's centre, name@x,y a point inside that pad or via, vN(x,y) a via of type N, cw(c..) or ccw(c..) an arc to the next point about the centre after c; other vN are vias at no path point)